# Altium PCB PCB_RB2_My — копия.PcbDoc (part 1 of 3)
Units mm, origin at the board's own origin, x right, y up, seen from the top; angles counter-clockwise.
Board outline 198 x 170 mm, 2 copper layers (Top, Bottom); 107 components, 89 nets, 429 pads, 3906 vias.
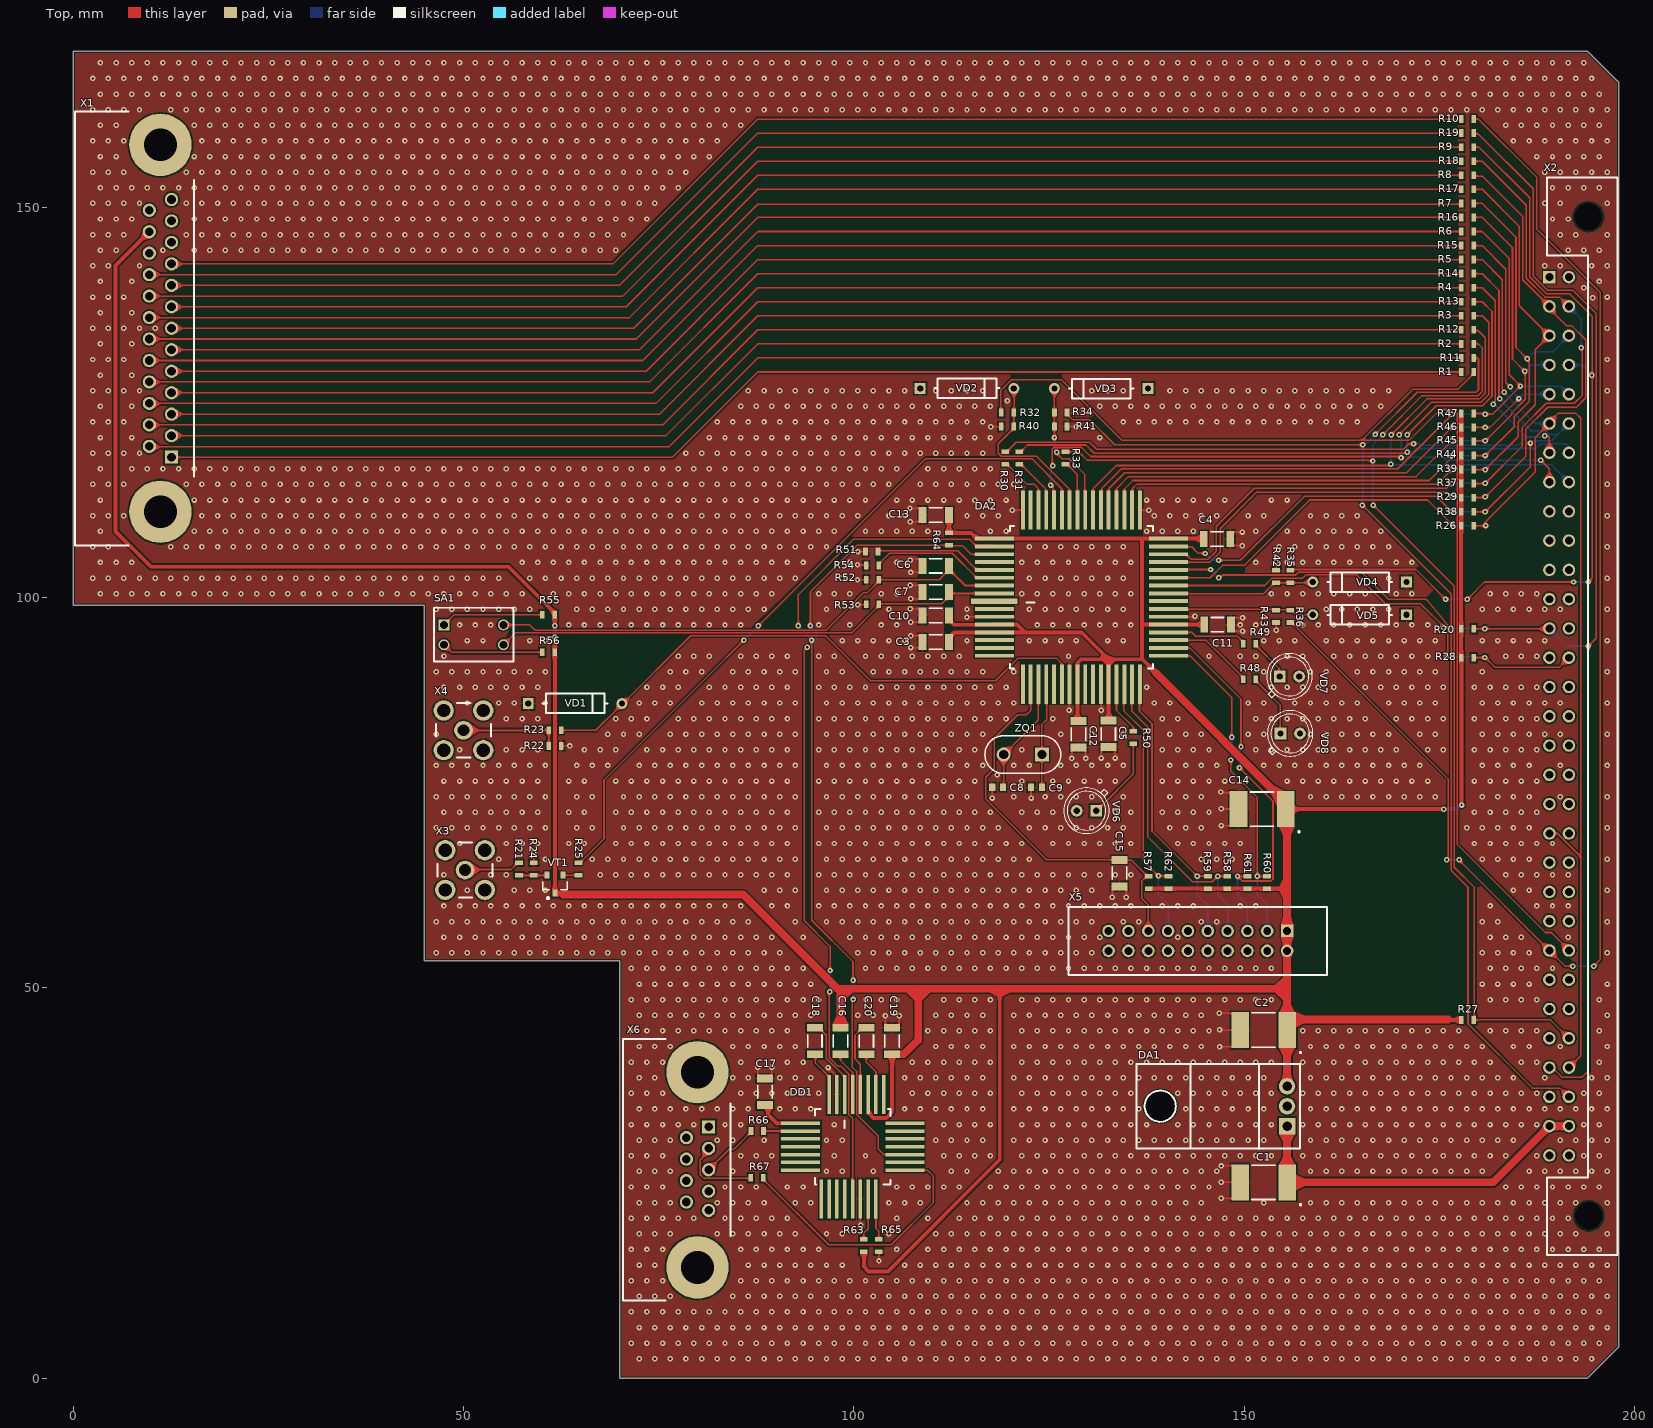
[diagram p0: Top view]
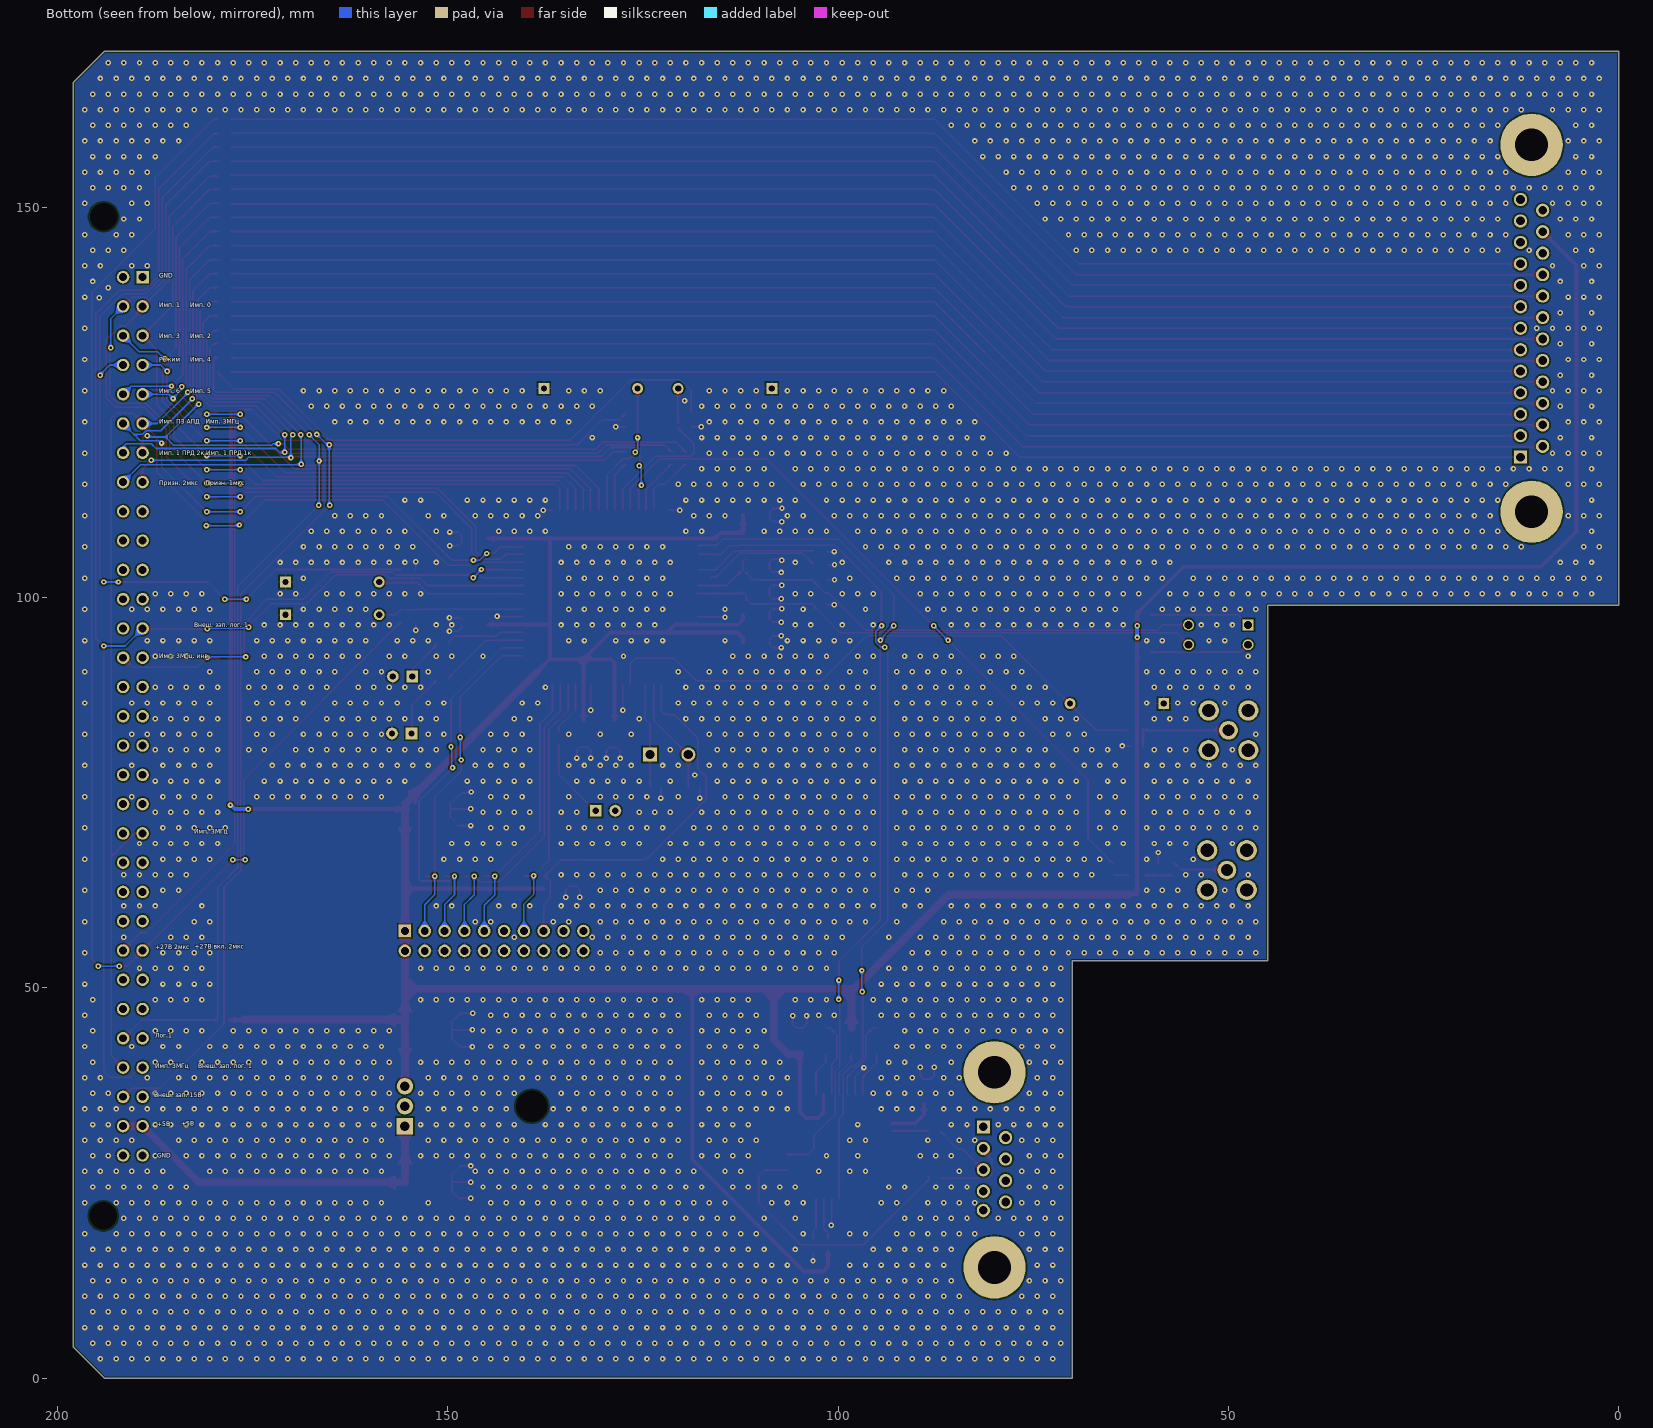
[diagram p1: Bottom view, seen from below]
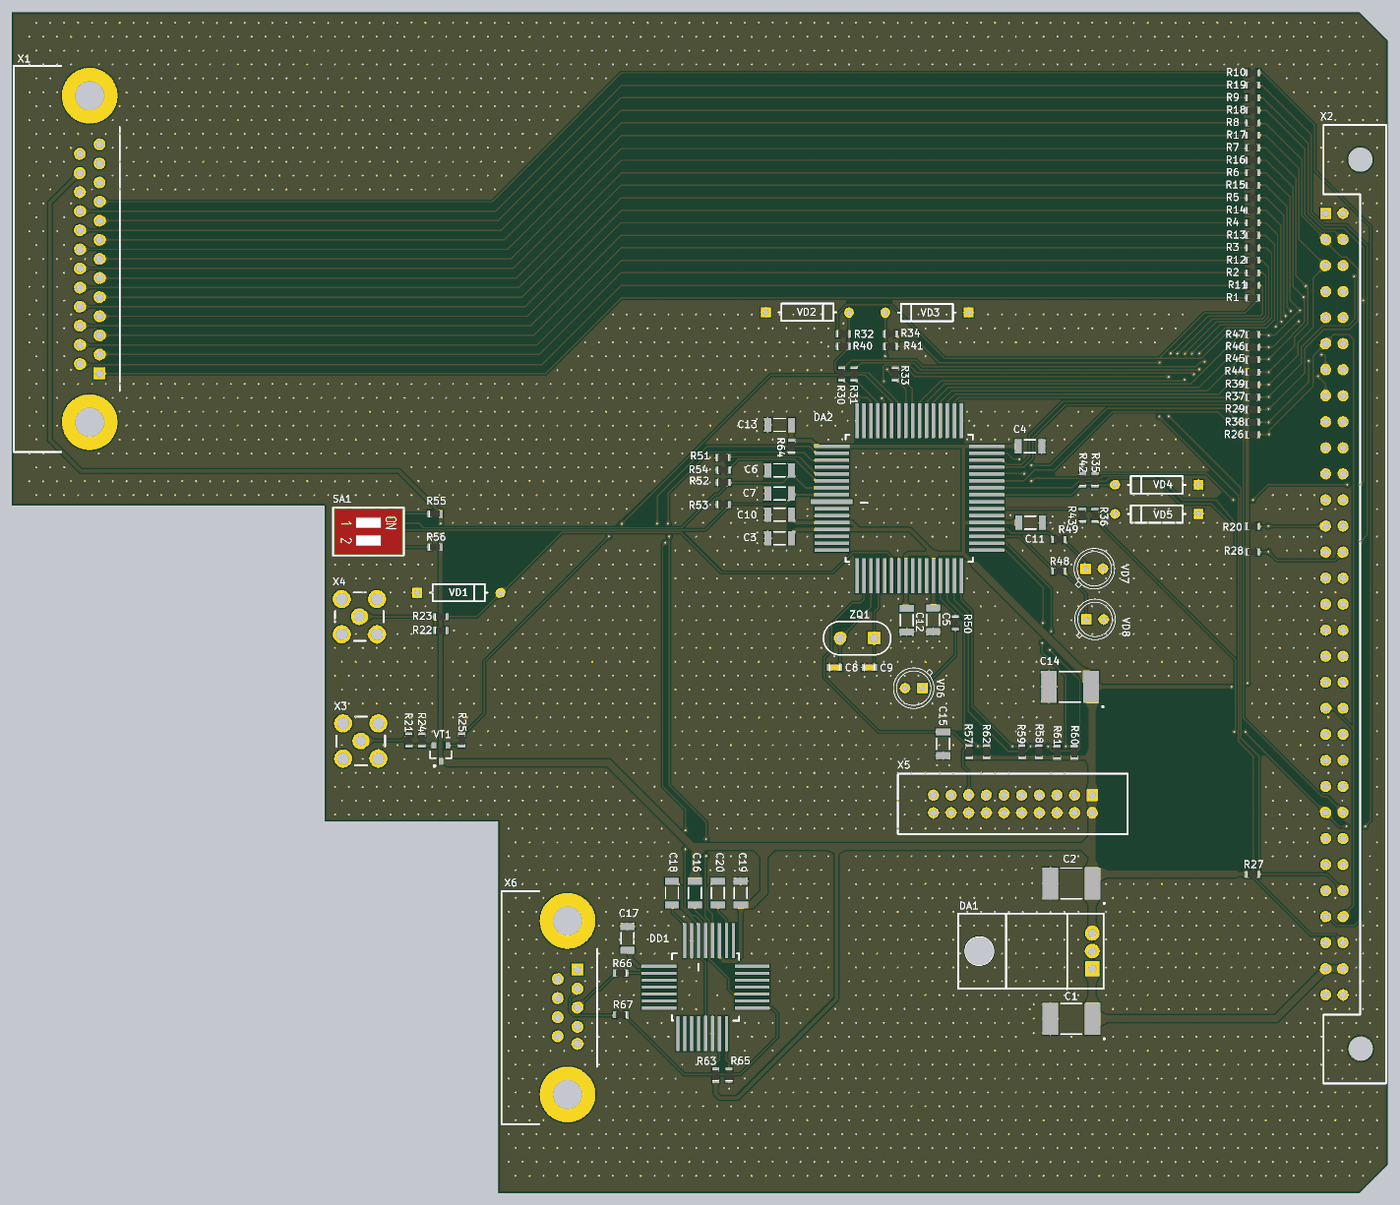
[diagram p4: 3D render of the assembled board from above, using the file's embedded part models]

## Layer stack, top to bottom
Top Solder: solder mask 0.0102, Solder Resist, Dk 3.5
Top: signal copper 0.0356
Dielectric 1: dielectric 0.32, FR-4, Dk 4.8
Bottom: signal copper 0.0356
Bottom Solder: solder mask 0.0102, Solder Resist, Dk 3.5

## Board outline
70,0 70,53.5 45,53.5 45,99 0,99 0,170 194,170 198,166 198,4 194,0

## Design rules (kind name [scope] priority, off if disabled: settings)
AcuteAngle [All] p1: minimum=3.50000000000000E+0001 checktracksonly=FALSE
BoardOutlineClearance "BoardOutlineClearance Fres ExtLayer" [OnTopLayer or OnBottomLayer] p1: gap=0.25 ignorepadtopadclearanceinfootprint=FALSE except(0: Arc-SplitContinuation Track-SplitContinuation SMDPad-SplitContinuation THPad-SplitContinuation Via-SplitContinuation Fill-SplitContinuation Poly-SplitContinuation Region-SplitContinuation Text-SplitContinuation) // Milling
BoardOutlineClearance "BoardOutlineClearance Fres IntLayer" [(OnMid        or OnMultiLayer) and not IsKeepOut] p2: gap=0.5 ignorepadtopadclearanceinfootprint=FALSE except(0: Arc-SplitContinuation Track-SplitContinuation SMDPad-SplitContinuation THPad-SplitContinuation Via-SplitContinuation Fill-SplitContinuation Poly-SplitContinuation Region-SplitContinuation Text-SplitContinuation) // Milling
Clearance "Clearance KeepOut" [All vs OnLayer('Keep-Out Layer')] p1: gap=0.5 ignorepadtopadclearanceinfootprint=TRUE // Standart
Clearance "Clearance Sdt" [All] p2: gap=0.125 ignorepadtopadclearanceinfootprint=TRUE except(0.2: Arc-Fill Arc-Poly Track-Fill Track-Poly SMDPad-SMDPad SMDPad-Fill SMDPad-Poly THPad-Fill THPad-Poly Via-Fill Via-Poly Fill-Fill Fill-Poly Poly-Poly Poly-Region Poly-Text; 0.25: Arc-Hole Track-Hole SMDPad-Hole THPad-Hole Via-Hole Fill-Hole Poly-Hole Region-Hole Text-Hole) // Standart
ComponentClearance ComponentClearance_Connector [(HasFootprint('СНП347-20ВП22-В') OR HasFootprint('СНП268-25РП32-1-4-В') OR HasFootprint('СНП268-9ВП32-1-4-В') OR HasFootprint('ГРПМ9-62ШУ2-В') OR HasFootprint('DS1040-02RN') OR HasFootprint('HYR-1149'))] p1: gap=1.6 collisioncheckmode=3 verticalgap=0.2 showdistances=FALSE
ComponentClearance ComponentClearance_VD [HasFootprint('2С127Д-1') or HasFootprint('3Л341Б') or HasFootprint('РК456')] p2: gap=1.2 collisioncheckmode=3 verticalgap=0.2 showdistances=FALSE
ComponentClearance [All] p3: gap=0.8 collisioncheckmode=3 verticalgap=0.2 showdistances=FALSE
DiffPairsRouting "DiffPairsRouting 1 Oz" [All] p1: maxlimit=0.5 minlimit=0.125 mostfreqgap=0.3 toplayer_minwidth=0.125 toplayer_maxwidth=0.5 toplayer_prefwidth=0.2 bottomlayer_minwidth=0.125 bottomlayer_maxwidth=0.5 bottomlayer_prefwidth=0.2 maxuncoupledlength=12.7
HoleSize "Minimum HoleSize" [IsPad] p1: absolutevalues=TRUE maxlimit=5.9 minlimit=0.6 maxpercent=80.000 minpercent=20.000
HoleSize "Minimum HoleSize VIA 1" [IsVia] p2: absolutevalues=TRUE maxlimit=5.9 minlimit=0.3 maxpercent=80.000 minpercent=20.000 // Standart
HoleSize "Minimum HoleSize VIA 2" [IsVia] p3: absolutevalues=TRUE maxlimit=5.9 minlimit=0.2 maxpercent=80.000 minpercent=20.000 // Advance
HoleToHoleClearance Hole2HoleClearance [All] p1: gap=0.25 allowstackedmicrovias=FALSE
MinimumAnnularRing "Minimum AR VIA Standart" [All] p1: minimumring=0.15
MinimumAnnularRing "Minimum AR PAD Standart" [All] p2: minimumring=0.2
MinimumSolderMaskSliver "SolderMask Bridge Standart" [All] p1: minsoldermaskwidth=0.15 // All Masks
PlaneClearance "PlaneClearance Std" [All] p1: clearance=0.2 // Standart
PlaneConnect "TermalConnect Std" [All] p1: pad.planeconnectstyle=Relief pad.reliefexpansion=0.2 pad.reliefentries=4 pad.reliefconductorwidth=0.3 pad.reliefairgap=0.2 via.planeconnectstyle=Direct via.reliefexpansion=0.2 via.reliefentries=4 via.reliefconductorwidth=0.2 via.reliefairgap=0.2 // Standart
PolygonConnect PolygonConnect_Via [isVia] p1: connectstyle=Direct reliefconductorwidth=0.254 reliefentries=4 polygonreliefangle="90 Angle" airgapwidth=0.254
PolygonConnect "PolygonConnect Std" [All] p2: connectstyle=Relief reliefconductorwidth=0.2 reliefentries=4 polygonreliefangle="90 Angle" airgapwidth=0.2 // Standart
RoutingCorners [All] p1 off: cornerstyle=45-Degree minsetback=2.54 maxsetback=2.54
RoutingVias [All] p1: holewidth=0.3 width=0.7 viastyle="Through Hole" minholewidth=0.3 minwidth=0.7 maxholewidth=0.6 maxwidth=1.1 viatemplateguid#1={5BCA8359-3FDF-4503-88DF-982B2CC54C6B} viatemplatename#1=v60h30m0mx0(Tol0-10)
SMDEntry [All] p1: side=TRUE corner=TRUE anyangle=TRUE
SMDNeckDown [All] p1: percent=100.000
SMDToCorner [All] p1: distance=0
SMDToPlane [All] p1: distance=0
SilkToSilkClearance Silk2SilkClearance [All] p1: silktosilkclearance=0.15
SilkToSolderMaskClearance Silk2SolderMaskClearance [IsPad] p1: minsilkscreentomaskgap=0.15 clearancetoexposedcopper=FALSE
SolderMaskExpansion "SolderMaskExpansion Std" [All] p1: expansion=0.05 istentingtop=FALSE // Standart
UnRoutedNet [All] p1: checkbadconnections=TRUE
Width "Width Std" [All] p1: maxlimit=10 minlimit=0.125 preferedwidth=0.2 checkconnectedcopper=TRUE // Standart
19 further rules are at their usual default settings.

## Components (designator, comment, footprint, x,y, rotation, side; value= is the part's Value field where it differs from the comment)
C1 "К53-65-16В-100мкФАЖЯР.673546.004ТУ" Chip2PinSM127P600-8N(E) 152.5,25.1 r180 top value=100мк
C2 "К53-65-16В-100мкФАЖЯР.673546.004ТУ" Chip2PinSM127P600-8N(E) 152.5,44.6 r180 top value=100мк
C3 "К10-17в-Н90-0,1мкФ-3ОЖО.460.107ТУ" CAPC3419X15N(1206) 110.5,94.3 r180 top value=0,1мк
C4 "К10-17в-Н90-0,1мкФ-3ОЖО.460.107ТУ" CAPC3419X15N(1206) 146.525,107.525 r0 top value=0,1мк
C5 "К10-17в-Н90-0,1мкФ-3ОЖО.460.107ТУ" CAPC3419X15N(1206) 132.6,82.55 r270 top value=0,1мк
C6 "К10-17в-Н90-0,1мкФ-3ОЖО.460.107ТУ" CAPC3419X15N(1206) 110.5,104.075 r0 top value=0,1мк
C7 "К10-17в-Н90-0,1мкФ-3ОЖО.460.107ТУ" CAPC3419X15N(1206) 110.5,100.7 r0 top value=0,1мк
C8 "К10-17в-МПО-22Ф10%-1ОЖО.460.107ТУ" "CAPC1608X09N (0603)" 118.419,75.703 r180 top value=22
C9 "К10-17в-МПО-22Ф10%-1ОЖО.460.107ТУ" "CAPC1608X09N (0603)" 123.4,75.7 r180 top value=22
C10 "К10-17в-Н90-0,1мкФ-3ОЖО.460.107ТУ" CAPC3419X15N(1206) 110.5,97.7 r180 top value=0,1мк
C11 "К10-17в-Н90-0,1мкФ-3ОЖО.460.107ТУ" CAPC3419X15N(1206) 146.6,96.525 r0 top value=0,1мк
C12 "К10-17в-Н90-0,1мкФ-3ОЖО.460.107ТУ" CAPC3419X15N(1206) 128.8,82.5 r270 top value=0,1мк
C13 "К10-17в-Н90-0,1мкФ-3ОЖО.460.107ТУ" CAPC3419X15N(1206) 110.5,110.6 r180 top value=0,1мк
C14 "К53-65-16В-100мкФАЖЯР.673546.004ТУ" Chip2PinSM127P600-8N(E) 152.3,72.9 r180 top value=100мк
C15 "К10-17в-Н90-0,1мкФ-3ОЖО.460.107ТУ" CAPC3419X15N(1206) 134.025,64.7 r270 top value=0,1мк
C16 "К10-17в-Н30-0,22мкФ-3ОЖО.460.107ТУ" CAPC3419X15N(1206) 98.3,43.2 r90 top value=0,22мк
C17 "К10-17в-Н30-0,22мкФ-3ОЖО.460.107ТУ" CAPC3419X15N(1206) 88.6,36.7 r270 top value=0,22мк
C18 "К10-17в-Н30-0,22мкФ-3ОЖО.460.107ТУ" CAPC3419X15N(1206) 95,43.2 r270 top value=0,22мк
C19 "К10-17в-Н30-0,22мкФ-3ОЖО.460.107ТУ" CAPC3419X15N(1206) 104.9,43.2 r270 top value=0,22мк
C20 "К10-17в-Н30-0,22мкФ-3ОЖО.460.107ТУ" CAPC3419X15N(1206) 101.6,43.2 r270 top value=0,22мк
DA1 "1303ЕН3.3ПАЕЯР.431420.638ТУ" КТ-28А-2.01 163,32.3 r90 top
DA2 "1986ВЕ92У" 1986ВЕ92У 121.65,88.9 r0 top
DD1 "5559ИН4У" 5559ИН4У 98.8,36.3 r270 top
R1 "Р1-12-0,1-05%" "RESC1608X05N (0603)" 178.6,128.9 r0 top value=0
R2 "Р1-12-0,1-05%" "RESC1608X05N (0603)" 178.6,132.5 r0 top value=0
R3 "Р1-12-0,1-05%" "RESC1608X05N (0603)" 178.6,136.1 r0 top value=0
R4 "Р1-12-0,1-05%" "RESC1608X05N (0603)" 178.6,139.7 r0 top value=0
R5 "Р1-12-0,1-05%" "RESC1608X05N (0603)" 178.6,143.3 r0 top value=0
R6 "Р1-12-0,1-05%" "RESC1608X05N (0603)" 178.6,146.9 r0 top value=0
R7 "Р1-12-0,1-05%" "RESC1608X05N (0603)" 178.6,150.5 r0 top value=0
R8 "Р1-12-0,1-05%" "RESC1608X05N (0603)" 178.6,154.1 r0 top value=0
R9 "Р1-12-0,1-05%" "RESC1608X05N (0603)" 178.6,157.7 r0 top value=0
R10 "Р1-12-0,1-05%" "RESC1608X05N (0603)" 178.6,161.3 r0 top value=0
R11 "Р1-12-0,1-05%" "RESC1608X05N (0603)" 178.6,130.7 r0 top value=0
R12 "Р1-12-0,1-05%" "RESC1608X05N (0603)" 178.6,134.3 r0 top value=0
R13 "Р1-12-0,1-05%" "RESC1608X05N (0603)" 178.6,137.9 r0 top value=0
R14 "Р1-12-0,1-05%" "RESC1608X05N (0603)" 178.6,141.5 r0 top value=0
R15 "Р1-12-0,1-05%" "RESC1608X05N (0603)" 178.6,145.1 r0 top value=0
R16 "Р1-12-0,1-05%" "RESC1608X05N (0603)" 178.6,148.7 r0 top value=0
R17 "Р1-12-0,1-05%" "RESC1608X05N (0603)" 178.6,152.3 r0 top value=0
R18 "Р1-12-0,1-05%" "RESC1608X05N (0603)" 178.6,155.9 r0 top value=0
R19 "Р1-12-0,1-05%" "RESC1608X05N (0603)" 178.6,159.5 r0 top value=0
R20 "Р1-12-0,125-10кОм5%" "RESC1608X05N (0603)" 178.6,96 r180 top value=10к
R21 "Р1-12-0,1-05%" "RESC1608X05N (0603)" 57.1,65.225 r270 top value=0
R22 "Р1-12-0,1-505%" "RESC1608X05N (0603)" 61.725,81 r180 top value=50
R23 "Р1-12-0,125-1к5%" "RESC1608X05N (0603)" 61.725,83 r0 top value=1к
R24 "Р1-12-0,125-560Ом5%" "RESC1608X05N (0603)" 59,65.225 r270 top value=560
R25 "Р1-12-0,125-560Ом5%" "RESC1608X05N (0603)" 64.725,65.225 r270 top value=560
R26 "Р1-12-0,125-10кОм5%" "RESC1608X05N (0603)" 178.6,109.2 r180 top value=10к
R27 "Р1-12-0,1-0,155%" "RESC1608X05N (0603)" 178.6,45.9 r180 top value=0,15
R28 "Р1-12-0,125-10кОм5%" "RESC1608X05N (0603)" 178.6,92.3 r180 top value=10к
R29 "Р1-12-0,125-10кОм5%" "RESC1608X05N (0603)" 178.6,112.8 r180 top value=10к
R30 "Р1-12-0,1-0,155%" "RESC1608X05N (0603)" 119.4,117.9 r270 top value=0,15
R31 "Р1-12-0,1-0,155%" "RESC1608X05N (0603)" 121.2,117.9 r270 top value=0,15
R32 "Р1-12-0,1-1,8кОм5%" "RESC1608X05N (0603)" 119.7,123.7 r0 top value=1,8к
R33 "Р1-12-0,1-0,155%" "RESC1608X05N (0603)" 127.125,117.9 r270 top value=0,15
R34 "Р1-12-0,1-1кОм5%" "RESC1608X05N (0603)" 126.5,123.7 r180 top value=1к
R35 "Р1-12-0,1-1,8кОм5%" "RESC1608X05N (0603)" 155.9,102.7 r270 top value=1,8к
R36 "Р1-12-0,1-1,8кОм5%" "RESC1608X05N (0603)" 155.9,97.6 r90 top value=1,8к
R37 "Р1-12-0,125-10кОм5%" "RESC1608X05N (0603)" 178.6,114.6 r180 top value=10к
R38 "Р1-12-0,125-10кОм5%" "RESC1608X05N (0603)" 178.6,111 r180 top value=10к
R39 "Р1-12-0,125-10кОм5%" "RESC1608X05N (0603)" 178.6,116.4 r180 top value=10к
R40 "Р1-12-0,125-2705%" "RESC1608X05N (0603)" 119.7,121.9 r180 top value=270
R41 "Р1-12-0,125-2705%" "RESC1608X05N (0603)" 126.5,121.9 r0 top value=270
R42 "Р1-12-0,125-2705%" "RESC1608X05N (0603)" 154.1,102.7 r90 top value=270
R43 "Р1-12-0,125-2705%" "RESC1608X05N (0603)" 154.1,97.6 r270 top value=270
R44 "Р1-12-0,125-10кОм5%" "RESC1608X05N (0603)" 178.6,118.2 r180 top value=10к
R45 "Р1-12-0,125-10кОм5%" "RESC1608X05N (0603)" 178.6,120 r180 top value=10к
R46 "Р1-12-0,125-10кОм5%" "RESC1608X05N (0603)" 178.6,121.8 r180 top value=10к
R47 "Р1-12-0,125-10кОм5%" "RESC1608X05N (0603)" 178.6,123.6 r180 top value=10к
R48 "Р1-12-0,125-1к5%" "RESC1608X05N (0603)" 150.7,89.55 r0 top value=1к
R49 "Р1-12-0,125-1к5%" "RESC1608X05N (0603)" 150.7,94.1 r0 top value=1к
R50 "Р1-12-0,125-1к5%" "RESC1608X05N (0603)" 135.8,82.1 r270 top value=1к
R51 "Р1-12-0,125-0,155%" "RESC1608X05N (0603)" 102.3,105.9 r0 top value=0,15
R52 "Р1-12-0,125-10кОм5%" "RESC1608X05N (0603)" 102.4,102.3 r0 top value=10к
R53 "Р1-12-0,125-10кОм5%" "RESC1608X05N (0603)" 102.375,99.15 r0 top value=10к
R54 "Р1-12-0,125-10кОм5%" "RESC1608X05N (0603)" 102.4,104.1 r180 top value=10к
R55 "Р1-12-0,125-10кОм5%" "RESC1608X05N (0603)" 60.9,97.8 r0 top value=10к
R56 "Р1-12-0,125-10кОм5%" "RESC1608X05N (0603)" 60.9,93 r0 top value=10к
R57 "Р1-12-0,125-10кОм5%" "RESC1608X05N (0603)" 137.775,63.525 r90 top value=10к
R58 "Р1-12-0,125-10кОм5%" "RESC1608X05N (0603)" 147.825,63.525 r90 top value=10к
R59 "Р1-12-0,125-10кОм5%" "RESC1608X05N (0603)" 145.375,63.525 r90 top value=10к
R60 "Р1-12-0,125-10кОм5%" "RESC1608X05N (0603)" 152.925,63.5 r90 top value=10к
R61 "Р1-12-0,125-10кОм5%" "RESC1608X05N (0603)" 150.45,63.5 r90 top value=10к
R62 "Р1-12-0,125-10кОм5%" "RESC1608X05N (0603)" 140.3,63.525 r90 top value=10к
R63 "Р1-12-0,125-10кОм5%" "RESC1608X05N (0603)" 101.275,17 r90 top value=10к
R64 "Р1-12-0,125-10кОм5%" "RESC1608X05N (0603)" 112.2,107.5 r90 top value=10к
R65 "Р1-12-0,1-0,155%" "RESC1608X05N (0603)" 103.2,17 r90 top value=0,15
R66 "Р1-12-0,1-0,155%" "RESC1608X05N (0603)" 87.625,31.675 r180 top value=0,15
R67 "Р1-12-0,1-0,155%" "RESC1608X05N (0603)" 87.6,25.675 r180 top value=0,15
SA1 "DS1040-02RN" DS1040-02RN 47.5,96.5 r270 top
VD1 "2С133аА0.339.092ТУ" 2С127Д-1 58.3,86.425 r0 top
VD2 "2С133аА0.339.092ТУ" 2С127Д-1 108.5,126.8 r0 top
VD3 "2С133аА0.339.092ТУ" 2С127Д-1 137.7,126.8 r180 top
VD4 "2С133аА0.339.092ТУ" 2С127Д-1 170.8,102 r180 top
VD5 "2С133аА0.339.092ТУ" 2С127Д-1 170.8,97.8 r180 top
VD6 "3Л341БаА0.339.189ТУ" 3Л341Б 129.8,72.7 r180 top
VD7 "3Л341БаА0.339.189ТУ" 3Л341Б 155.8,89.9 r0 top
VD8 "3Л341БаА0.339.189ТУ" 3Л341Б 155.9,82.6 r0 top
VT1 "2Т368А9аА0.339.092ТУ" "SOT100P230X95-3N (2T368A9)" 61.725,63.3 r270 top
X1 "СНП268-25РП32-1-3-В" СНП268-25РП32-1-4-В 12.6,118 r270 top
X2 "ГРПМ9-62ШУ2-В" ГРПМ9-62ШУ2-В 188.8,153.8 r90 top
X3 "HYR-1149" HYR-1149 50.2,65.1 r0 top
X4 "HYR-1149" HYR-1149 50,83 r0 top
X5 "СНП347-20ВП32-В" СНП347-20ВП22-В 155.5,57.3 r180 top
X6 "СНП268-9ВП32-1-3-В" СНП268-9ВП32-1-4-В 81.4,32.2 r270 top
ZQ1 "РК386-П-8ДТ-8000КТУ6321-004-07614320-96" РК456 124.1,79.9 r180 top value=8М

## Footprints (in the part's own frame and the unit in brackets; to place one, negate y for a bottom-side part, rotate by r counter-clockwise, add the part's x,y. Pads: shape width x height; smd on the part's side, far side on the other; paste and mask are expansions set on the pad)
2С127Д-1 [mm]
  rect 1.4x1.4 hole 0.8: 1(0,0)
  round 1.4 hole 0.8: 2(12,0)
  silkscreen extent 1.85,-1.23 10.15,1.27
3Л341Б [mm]
  rect 1.5x1.5 hole 0.8: 1(-1.25,0)
  round 1.5 hole 0.8: 2(1.25,0)
  silkscreen extent -2.92,-2.92 2.92,2.92
1986ВЕ92У [mm]
  rect 6x0.7 smd: 1(-3.65,10.65)
  rect 5x0.5 smd: 2(-3.65,9.65) 3(-3.65,8.65) 4(-3.65,7.65) 5(-3.65,6.65) 6(-3.65,5.65) 7(-3.65,4.65) 8(-3.65,3.65) 25(18.65,3.65) 26(18.65,4.65) 27(18.65,5.65) 28(18.65,6.65) 29(18.65,7.65) 30(18.65,8.65) 31(18.65,9.65) 32(18.65,10.65) 33(18.65,11.65) 34(18.65,12.65) 35(18.65,13.65) 36(18.65,14.65) 37(18.65,15.65) 38(18.65,16.65) 39(18.65,17.65) 40(18.65,18.65) 57(-3.65,18.65) 58(-3.65,17.65) 59(-3.65,16.65) 60(-3.65,15.65) 61(-3.65,14.65) 62(-3.65,13.65) 63(-3.65,12.65) 64(-3.65,11.65)
  rect 0.5x5 smd: 9(0,0) 10(1,0) 11(2,0) 12(3,0) 13(4,0) 14(5,0) 15(6,0) 16(7,0) 17(8,0) 18(9,0) 19(10,0) 20(11,0) 21(12,0) 22(13,0) 23(14,0) 24(15,0) 41(15,22.3) 42(14,22.3) 43(13,22.3) 44(12,22.3) 45(11,22.3) 46(10,22.3) 47(9,22.3) 48(8,22.3) 49(7,22.3) 50(6,22.3) 51(5,22.3) 52(4,22.3) 53(3,22.3) 54(2,22.3) 55(1,22.3) 56(0,22.3)
  silkscreen extent -1.65,2 16.65,20.3
5559ИН4У [mm]
  rect 5x0.45 smd: 1(-0.05,0.04) 2(-0.05,-0.96) 3(-0.05,-1.96) 11(13.33,-1.96) 12(13.33,-0.96) 13(13.33,0.04) 14(13.33,1.04) 15(13.33,2.04) 16(13.33,3.04) 17(13.33,4.04) 25(-0.05,4.04) 26(-0.05,3.04) 27(-0.05,2.04) 28(-0.05,1.04) 29(-0.05,5.04) 30(13.33,-2.96)
  rect 0.45x5 smd: 4(3.64,-5.65) 5(4.64,-5.65) 6(5.64,-5.65) 7(6.64,-5.65) 8(7.64,-5.65) 9(8.64,-5.65) 10(9.64,-5.65) 18(9.64,7.73) 19(8.64,7.73) 20(7.64,7.73) 21(6.64,7.73) 22(5.64,7.73) 23(4.64,7.73) 24(3.64,7.73)
  silkscreen extent 1.8,-3.8 11.48,5.87
"CAPC1608X09N (0603)" [mm] "Chip Capacitor, 2-Leads, Body 1.60x0.80mm, IPC Medium Density"
  rect 0.8x1 smd: 1(-0.7,0) 2(0.7,0)
  body extent -0.85,-0.45 0.85,0.45, height 0.9
CAPC3419X15N(1206) [mm] "Chip Capacitor, 2-Leads, Body 3,35x1,90mm, IPC Medium Density"
  rect 1x2.05 smd: 1(-1.7,0) 2(1.7,0)
  silkscreen extent -0.8,-0.93 0.8,0.92, body extent -1.85,-1 1.85,1, height 1.5
Chip2PinSM127P600-8N(E) [mm]
  rect 2.25x4.6 smd: 1(-3.025,0) 2(3.025,0)
  silkscreen extent -4.77,-2.2 1.5,2.92, body extent -3.8,-2.3 3.8,2.3, height 4.1
DS1040-02RN [mm]
  rect 1.4x1.4 hole 1: 1(0,0)
  round 1.4 hole 1: 2(0,7.62) 3(2.54,0) 4(2.54,7.62)
  silkscreen extent -2.2,-1.3 4.7,8.9, body extent -2,-1.14 4.54,8.76, height 6.8
HYR-1149 [mm]
  round 2.4 hole 1.5: 1(0,0)
  round 2.6 hole 1.7: 2(2.54,-2.54) 3(2.54,2.54) 4(-2.54,2.54) 5(-2.54,-2.54)
  silkscreen extent -3.5,-3.5 3.5,3.5
"RESC1608X05N (0603)" [mm] "Chip Resistor, 2-Leads, Body 1.60x0.85mm, IPC Medium Density"
  rect 0.6x1 smd: 1(-0.8,0) 2(0.8,0)
  body extent -0.85,-0.48 0.85,0.48, height 0.45
"SOT100P230X95-3N (2T368A9)" [mm] "SOT23, 3-Leads, Body 2,85x2,30mm, Pitch 1,00mm, IPC Medium Density"
  rect 0.9x0.65 smd: 1(1.15,0) 2(-1.15,1) 3(-1.15,-1)
  silkscreen extent -0.3,-1.55 1.94,1.55, body extent -0.7,-1.52 0.7,1.53, height 0.95
ГРПМ9-62ШУ2-В [mm]
  round 3.2 hole 3.5: 1(-133,-5.35) 2(-5,-5.3)
  rect 1.6x1.6 hole 1: 1A(-12.75,-0.3)
  round 1.6 hole 1: 1B(-12.75,-2.8) 2A(-16.5,-0.3) 2B(-16.5,-2.8) 3A(-20.25,-0.3) 3B(-20.25,-2.8) 4A(-24,-0.3) 4B(-24,-2.8) 5A(-27.75,-0.3) 5B(-27.75,-2.8) 6A(-31.5,-0.3) 6B(-31.5,-2.8) 7A(-35.25,-0.3) 7B(-35.25,-2.8) 8A(-39,-0.3) 8B(-39,-2.8) 9A(-42.75,-0.3) 9B(-42.75,-2.8) 10A(-46.5,-0.3) 10B(-46.5,-2.8) 11A(-50.25,-0.3) 11B(-50.25,-2.8) 12A(-54,-0.3) 12B(-54,-2.8) 13A(-57.75,-0.3) 13B(-57.75,-2.8) 14A(-61.5,-0.3) 14B(-61.5,-2.8) 15A(-65.25,-0.3) 15B(-65.25,-2.8) 16A(-69,-0.3) 16B(-69,-2.8) 17A(-72.75,-0.3) 17B(-72.75,-2.8) 18A(-76.5,-0.3) 18B(-76.5,-2.8) 19A(-80.25,-0.3) 19B(-80.25,-2.8) 20A(-84,-0.3) 20B(-84,-2.8) 21A(-87.75,-0.3) 21B(-87.75,-2.8) 22A(-91.5,-0.3) 22B(-91.5,-2.8) 23A(-95.25,-0.3) 23B(-95.25,-2.8) 24A(-99,-0.3) 24B(-99,-2.8) 25A(-102.75,-0.3) 25B(-102.75,-2.8) 26A(-106.5,-0.3) 26B(-106.5,-2.8) 27A(-110.25,-0.3) 27B(-110.25,-2.8) 28A(-114,-0.3) 28B(-114,-2.8) 29A(-117.75,-0.3) 29B(-117.75,-2.8) 30A(-121.5,-0.3) 30B(-121.5,-2.8) 31A(-125.25,-0.3) 31B(-125.25,-2.8)
  silkscreen extent -138,-9 0,0
КТ-28А-2.01 [mm]
  rect 2.1x2.1 hole 1.2: 1(0,7.5)
  round 2.1 hole 1.2: 2(2.55,7.5) 3(5.1,7.5)
  round 2 hole 4: 4(2.55,23.75)
  silkscreen extent -2.95,5.85 7.95,26.8, body extent -2.53,7.21 7.63,26.7, height 4.2
РК456 [mm]
  rect 1.8x1.8 hole 1.2: 1(0,0)
  round 1.8 hole 1.2: 2(4.9,0)
  silkscreen extent -2.4,-2.4 7.3,2.4
СНП268-9ВП32-1-4-В [mm]
  rect 1.7x1.7 hole 1.1: 1(0,0)
  round 1.7 hole 1.1: 2(2.75,0) 3(5.5,0) 4(8.25,0) 5(10.7,0) 6(1.375,-2.84) 7(4.125,-2.84) 8(6.875,-2.84) 9(9.625,-2.84)
  round 8 hole 4.2: 10(-7,-1.42) 11(18,-1.42)
  silkscreen extent -11.25,-10.94 22.25,2.83
СНП268-25РП32-1-4-В [mm]
  rect 1.7x1.7 hole 1.1: 1(0,0)
  round 1.7 hole 1.1: 2(-2.75,0) 3(-5.5,0) 4(-8.25,0) 5(-11,0) 6(-13.75,0) 7(-16.5,0) 8(-19.25,0) 9(-22,0) 10(-24.75,0) 11(-27.5,0) 12(-30.25,0) 13(-33,0) 14(-1.375,-2.84) 15(-4.125,-2.84) 16(-6.875,-2.84) 17(-9.625,-2.84) 18(-12.375,-2.84) 19(-15.125,-2.84) 20(-17.875,-2.84) 21(-20.625,-2.84) 22(-23.375,-2.84) 23(-26.125,-2.84) 24(-28.875,-2.84) 25(-31.625,-2.84)
  round 8 hole 4.2: 26(7,-1.42) 27(-40,-1.42)
  silkscreen extent -44.3,-12.34 11.3,2.9
СНП347-20ВП22-В [mm]
  rect 1.6x1.6 hole 1.02: 1(0,0)
  round 1.6 hole 1.02: 2(0,2.54) 3(2.54,0) 4(2.54,2.54) 5(5.08,0) 6(5.08,2.54) 7(7.62,0) 8(7.62,2.54) 9(10.16,0) 10(10.16,2.54) 11(12.7,0) 12(12.7,2.54) 13(15.24,0) 14(15.24,2.54) 15(17.78,0) 16(17.78,2.54) 17(20.32,0) 18(20.32,2.54) 19(22.86,0) 20(22.86,2.54)
  silkscreen extent -5.12,-3.08 27.98,5.62

## Part data
C1 C2 C14: library part CapTan, "Танталовый конденсатор", manufacture=АЖЯР.673546.004ТУ, Footpr="\"E\"", Name="Танталовый конденсатор", name_main=К53-65-16В-, Units=Ф
C3 C4 C5 C6 C7 C10 C11 C12 C13 C15: library part CapCer, "Керамический конденсатор", manufacture=ОЖО.460.107ТУ, Footpr=1206, Name="Керамический конденсатор", name_main=К10-17в-Н90-, nameSuf=-3, Units=Ф
C8 C9: library part CapCer_2, "Керамический конденсатор", manufacture=ОЖО.460.107ТУ, Tolerance=10%, Footpr=0603, Name="Керамический конденсатор", name_main=К10-17в-МПО-, nameSuf=-1, Units=Ф
C16 C17 C18 C19 C20: library part CapCer_1, "Керамический конденсатор", manufacture=ОЖО.460.107ТУ, Footpr=1206, Name="Керамический конденсатор", name_main=К10-17в-Н30-, nameSuf=-3, Units=Ф
DA1: library part Stabil, manufacture=АЕЯР.431420.638ТУ, Name=Микросхема, name_main=1303ЕН3.3П
DA2: library part 1986ВЕ93, "Микроконтроллер", manufacture=АЕЯР.431290.711ТУ, Name=Микросхема, name_main=1986ВЕ92У
DD1: "Приемопередатчик RS232", manufacture=АЕЯР.431230.460ТУ, Name=Микросхема, name_main=5559ИН4У
R1 R2 R3 R4 R5 R6 R7 R8 R9 R10 R11 R12 R13 R14 R15 R16 R17 R18 R19 R21: library part Res_1, "Резистор", Manufacturer=АЛЯР.434110.005ТУ, Tolerance=5%, Name=Резистор, name_main=Р1-12-0,1-
R20 R26 R28 R29 R37 R38 R39 R44 R45 R46 R47 R52 R53 R54 R55 R56 R57 R58 R59 R60 R61 R62 R63 R64: library part Res_7, "Резистор", Manufacturer=АЛЯР.434110.005ТУ, Tolerance=5%, Name=Резистор, name_main=Р1-12-0,125-, Units=Ом
R22: library part Res, "Резистор", Manufacturer=АЛЯР.434110.005ТУ, Tolerance=5%, Name=Резистор, name_main=Р1-12-0,1-
R23 R48 R49 R50: library part Res_8, "Резистор", Manufacturer=АЛЯР.434110.005ТУ, Tolerance=5%, Name=Резистор, name_main=Р1-12-0,125-
R24 R25: library part Res_3, "Резистор", Manufacturer=АЛЯР.434110.005ТУ, Tolerance=5%, Name=Резистор, name_main=Р1-12-0,125-, Units=Ом
R27 R30 R31 R33 R51 R65 R66 R67: library part Res_4, "Резистор", Manufacturer=АЛЯР.434110.005ТУ, Tolerance=5%, Name=Резистор
  R27 R30 R31 R33 R65 R66 R67: name_main=Р1-12-0,1-
  R51: name_main=Р1-12-0,125-
R32 R35 R36: library part Res_5, "Резистор", Manufacturer=АЛЯР.434110.005ТУ, Tolerance=5%, Name=Резистор, name_main=Р1-12-0,1-, Units=Ом
R34: library part Res_2, "Резистор", Manufacturer=АЛЯР.434110.005ТУ, Tolerance=5%, Name=Резистор, name_main=Р1-12-0,1-, Units=Ом
R40 R41 R42 R43: library part Res_6, "Резистор", Manufacturer=АЛЯР.434110.005ТУ, Tolerance=5%, Name=Резистор, name_main=Р1-12-0,125-
SA1: library part Switch, "Переключатель", Name=Переключатель, name_main=DS1040-02RN
VD1 VD2 VD3 VD4 VD5: library part 2С127Д-1, manufacture=аА0.339.092ТУ, Name=Стабилитрон, name_main=2С133
VD6 VD7 VD8: library part Led, "Индикатор", manufacture=аА0.339.189ТУ, Name=Индикатор, name_main=3Л341Б
VT1: library part 2Т368А, "NPN транзистор", manufacture=аА0.339.092ТУ, Name=Транзистор, name_main=2Т368А9
X1: library part СНП268-25РП, manufacture=БСАР.430420.014ТУ, Name=Разъемы, name_main=СНП268-25РП32-1-3-В
X2: library part GRPM9-62, manufacture=Ке0.364.009ТУ, Name=Разъемы, name_main=ГРПМ9-62ШУ2-В
X3 X4: library part SMA, manufacture=Чип&Дип, Name=Разъемы, name_main=HYR-1149
X5: library part СНП347-20ВП, manufacture=РЮМК.430420.012ТУ, Name=Разъемы, name_main=СНП347-20ВП32-В
X6: library part СНП268-9ВП, manufacture=БСАР.430420.014ТУ, Name=Разъемы, name_main=СНП268-9ВП32-1-3-В
ZQ1: library part XTAL, "Кварцевый резонатор", manufacture=ТУ6321-004-07614320-96, Name="Кварцевый резонатор", name_main=РК386-П-8ДТ-8000К, Units=Гц

## Via types
v1: diameter 0.7, hole 0.3, Top to Bottom, tented both sides, 3906 vias

## Nets (pads, with @x,y where several pads share a name; then routed paths per layer and width w, separated by ;. In a path a pad name is that pad's centre, name@x,y a point inside that pad or via, vN(x,y) a via of type N, cw(c..) or ccw(c..) an arc to the next point about the centre after c; other vN are vias at no path point)
+3,3В: C2.1 C3.1 C4.1 C5.1 C10.1 C11.1 C12.1 C13.1 C14.1 C16.2 C19.2 DA1.3 DA2.4 DA2.5 DA2.16 DA2.20 DA2.29 DA2.40 DA2.57 DD1.26 R20.2 R26.2 R27.2 R28.2 R29.2 R37.2 R38.2 R39.2 R44.2 R45.2 R46.2 R47.2 R55.2 R56.2 R57.1 R58.1 R59.1 R60.1 R61.1 R62.1 R63.1 R64.2 VT1.1 X1.24 X5.1 X5.2 | length 602.3
  Top w0.4: DD1.26@101.84,36.35 101.865,36.325 101.865,34.05 102.331,33.584 102.331,33.531
  Top w0.5: X1.24@9.76,146.875 5.45,142.565 5.45,108.475 9.975,103.95 55.75,103.95 61.7,98 R55.2@61.7,97.8 v1(61.7,96.4) ; v1(61.7,94.9) R56.2@61.7,93 61.7,62.05 62.7,62.05 62.775,61.975 ; R63.1@101.275,16.2 101.3,16.175 101.3,14.3 101.9,13.7 104.4,13.7 118.7,28 118.7,49.9 ; 102.331,33.531 102.512,33.35 104.15,33.35 104.9,34.1 C19.2@104.9,41.5 ; C3.1@112.2,94.3 112.2,94.825 112.925,95.55 DA2.5@118,95.55 121.9,95.55 ; C10.1@112.2,97.7 112.2,97.175 112.85,96.525 DA2.4@117.925,96.525 ; R64.2@112.2,108.3 R64.2@112.25,108.3 ; C13.1@112.2,110.6 112.2,108.35 R64.2@112.25,108.3 ; R64.2@112.3,108.25 R64.2@112.25,108.3 ; DA2.4@118,96.55 120.925,96.55 121.9,95.575 121.9,95.55 ; C12.1@128.65,84.325 DA2.16@128.65,88.9 128.65,91.65 129.1,92.1 132.65,92.1 ; C5.1@132.6,84.25 132.65,84.3 DA2.20@132.65,88.9 132.65,92.1 ; 136.934,107.5 136.934,96.5 ; R57.1@137.775,62.725 R62.1@140.3,62.725 R59.1@145.375,62.725 R58.1@147.825,62.725 155.5,62.725 ; 138.675,90.384 136.959,92.1 ; DA2.40@140.25,107.55 DA2.57@118,107.55 115.75,107.55 115.75,107.6 115.05,108.3 R64.2@112.25,108.3 ; DA2.40@140.3,107.55 C4.1@144.8,107.55 ; C11.1@144.825,96.55 DA2.29@140.3,96.55 136.984,96.55 136.934,96.5 ; C14.1@155.5,72.9 v1(175.55,72.9) ; 176.125,45.975 176.2,45.9 R27.2@177.8,45.9 R27.2@177.85,45.9 ; R20.2@177.8,96 R28.2@177.8,92.3 177.85,92.25 177.85,91.804 v1(177.85,73.425) ; R20.2@177.8,96.2 R26.2@177.8,109.2 R38.2@177.8,111 R29.2@177.8,112.8 R37.2@177.8,114.6 R39.2@177.8,116.4 R44.2@177.8,118.2 R45.2@177.8,119.7 ; R45.2@177.8,119.9 R46.2@177.8,121.8 R47.2@177.8,123.6 ; 121.9,95.55 129.2,95.55 132.65,92.1 ; 132.65,92.1 136.959,92.1 ; 136.934,96.5 136.934,92.125 136.959,92.1
  Top w1: 62.775,61.975 85.836,61.975 97.911,49.9 98.3,49.9 ; C16.2@98.3,44.9 98.3,49.9 ; C19.2@104.9,41.5 106.4,41.5 108.25,43.35 108.25,49.9 ; 138.675,90.384 138.675,90.375 C14.1@155.5,73.55 ; C14.1@155.325,72.9 155.5,72.9 155.5,62.725 X5.1@155.5,57.3 ; DA1.3@155.5,37.4 C2.1@155.5,44.6 ; C2.1@155.5,45.2 155.5,49.9 ; X5.1@155.5,57 X5.2@155.5,54.76 155.5,49.9 ; C2.1@155.525,44.6 155.525,45.35 156.15,45.975 176.125,45.975 ; 98.3,49.9 108.25,49.9 ; 108.25,49.9 118.7,49.9 155.5,49.9
  Bottom w0.5: v1(61.7,94.9) v1(61.7,96.4) ; v1(175.55,72.9) 177.271,72.9 177.796,73.425 v1(177.85,73.425)
+5В: C1.1 DA1.1 X2.30A X2.30B | length 46.3
  Top w1: DA1.1@155.5,32.3 155.5,25.125 C1.1@155.525,25.1 181.9,25.1 X2.30A@189.1,32.3 X2.30B@191.6,32.3
"+27В 2мкс": R1.2 R32.1 X2.24B | length 160.1
  Top w0.2: R32.1@118.85,123.7 118.85,126.55 120.2,127.9 126.6,127.9 134.325,120.175 165.1,120.175 ; R1.2@179.4,128.9 179.4,128.7 177.39,126.69 171.615,126.69 165.1,120.175 ; X2.24B@191.6,54.8 191.6,54.85 189.35,57.1 188.6,57.1 177.275,68.425 177.275,112.909 177.275,123.65 176.825,124.1 175.1,124.1 171.175,120.175 165.1,120.175
"+27В вкл. 2мкс": R10.2 R36.1 X2.24A | length 179.4
  Top w0.2: R36.1@155.9,96.8 156.1,96.8 176.125,76.775 176.125,66.735 175.95,66.56 v1(175.95,66.425) ; v1(177.575,66.4) 177.575,66.325 X2.24A@189.1,54.8 191.1,52.8 v1(192.1,52.8) ; R10.2@179.4,161.3 180,161.3 187.5,153.8 187.5,147.2 195.6,139.1 195.6,53.6 v1(194.8,52.8)
  Bottom w0.2: v1(175.95,66.425) 175.975,66.4 v1(177.575,66.4) ; v1(192.1,52.8) v1(194.8,52.8)